# EAGLE board controlnode (EAGLE 6.5.0)

Size 100 x 80 mm. Coordinates in mm from the lower left corner, seen from the top.
Outline: 0,0 100,0 100,80 0,80 0,0
Copper layers (1*16): Top 0.035mm / dielectric 1.5mm / Bottom 0.035mm
Design rules "SeeedStudio_2layer_DRU_no_angle_20140221": minimum track width 6mil, minimum drill 12mil, track to track 6mil, track to pad 6mil, pad to pad 6mil, via to via 6mil, smd to smd 0mil, copper to edge 10mil, drill to drill 10mil, minimum pad ring 10mil, minimum via ring 6mil, stop-mask expansion 2mil, vias tented up to drill 100mil, thermal gap 10mil

## Footprints (pad centres in the part's own frame; a part is rotated, then mirrored left to right if it is on the bottom)
C0805 = smd 1.3 x 1.5: 1 -0.95,0; 2 0.95,0
C1206 = smd 1.6 x 1.8: 1 -1.4,0; 2 1.4,0
E3,5-10 = drill 0.813 pad 1.6: + -1.778,0 | drill 0.813 pad 1.6 octagon: - 1.778,0
3,2 = hole 3.2: 0,0
ATX24_RIGHT_ANGLE = drill 1.8 pad 2.9: 1 23.1,4.76; 2 18.9,4.76; 3 14.7,4.76; 4 10.5,4.76; 5 6.3,4.76; 6 2.1,4.76; 7 -2.1,4.76; 8 -6.3,4.76; 9 -10.5,4.76; 10 -14.7,4.76; 11 -18.9,4.76; 12 -23.1,4.76; 13 23.1,10.26; 14 18.9,10.26; 15 14.7,10.26; 16 10.5,10.26; 17 6.3,10.26; 18 2.1,10.26; 19 -2.1,10.26; 20 -6.3,10.26; 21 -10.5,10.26; 22 -14.7,10.26; 23 -18.9,10.26; 24 -23.1,10.26 | hole 3: -23.1,-2.54; 23.1,-2.54
SCREWTERMINAL-5MM-3 = drill 1.3 pad 2.413 square: 1 0,0 | drill 1.3 pad 2.413: 2 5,0; 3 10,0
WS2812B = smd 1.5 x 0.9: 1-VDD 2.45,-1.65; 2-DOUT 2.45,1.65; 3-GND -2.45,1.65; 4-DIN -2.45,-1.65
SWITCH-SPDT = drill 1.016 pad 1.88: 1 0,2.54; 2 0,0; 3 0,-2.54
ALPS_EC12E_SW = drill 1 square: A -2.5,-7.5; B 2.5,-7.5; C 0,-7.5; D -2.5,7; E 2.5,7 | drill 2.2 square: GND1 -6.1,0; GND2 6.1,0
LCD-16X2_NOHOLES = drill 1.016 pad 1.88 square: 1 -32,15.5 | drill 1.016 pad 1.88: 2 -29.46,15.5; 3 -26.92,15.5; 4 -24.38,15.5; 5 -21.84,15.5; 6 -19.3,15.5; 7 -16.76,15.5; 8 -14.22,15.5; 9 -11.68,15.5; 10 -9.14,15.5; 11 -6.6,15.5; 12 -4.06,15.5; 13 -1.52,15.5; 14 1.02,15.5; 15 3.56,15.5; 16 6.1,15.5
ARDUINO_PRO_MINI = drill 1.016 pad 1.88: 1 -7.62,12.7; 2 -7.62,10.16; 3 -7.62,7.62; 4 -7.62,5.08; 5 -7.62,2.54; 6 -7.62,0; 7 -7.62,-2.54; 8 -7.62,-5.08; 9 -7.62,-7.62; 10 -7.62,-10.16; 11 -7.62,-12.7; 12 -7.62,-15.24; 13 7.62,-15.24; 14 7.62,-12.7; 15 7.62,-10.16; 16 7.62,-7.62; 17 7.62,-5.08; 18 7.62,-2.54; 19 7.62,0; 20 7.62,2.54; 21 7.62,5.08; 22 7.62,7.62; 23 7.62,10.16; 24 7.62,12.7; A4 4.763,1.429; A5 4.763,3.969; A6 4.763,-9.049; A7 4.763,-6.509; BLK -6.35,15.24; GND -3.81,15.24; GRN 6.35,15.24; RXI 1.27,15.24; TXO 3.81,15.24; VCC -1.27,15.24
5566-4 = drill 1.4 square: 1 2.1,-2.75; 2 -2.1,-2.75; 3 2.1,2.75; 4 -2.1,2.75 | hole 3: 6.8,2.29; -6.8,2.29
5566-6 = drill 1.4 square: 1 4.2,-2.75; 2 0,-2.75; 3 -4.2,-2.75; 4 4.2,2.75; 5 0,2.75; 6 -4.2,2.75 | hole 3: 8.9,2.29; -8.9,2.29

## Placement (x,y rotation side)
C1  100 nF  [C0805]  28.94,40.4 90 bottom
C2  100 nF  [C0805]  51.8,40.4 90 bottom
C3  100 nF  [C0805]  69.58,40.4 90 bottom
C4  100 nF  [C0805]  17.78,53.34 90 top
C5  100 nF  [C0805]  48.26,71.12 270 bottom
C6  10 uF  [C1206]  66.04,71.12 270 bottom
C7  10 uF  [C1206]  27.94,71.12 270 bottom
C8  100 uF  [E3,5-10]  81.28,50.8 0 top
C9  100 uF  [E3,5-10]  81.28,63.5 270 top
H1  MOUNT-HOLE3.2  [3,2]  5,75 0 top
H2  MOUNT-HOLE3.2  [3,2]  95,75 0 top
H3  MOUNT-HOLE3.2  [3,2]  5,5 0 top
H4  MOUNT-HOLE3.2  [3,2]  95,5 0 top
J1  ATX24RH  [ATX24_RIGHT_ANGLE]  49,5 0 bottom
JP1  [SCREWTERMINAL-5MM-3]  95,41 90 bottom
JP2  [SCREWTERMINAL-5MM-3]  95,23 90 bottom
JP3  [SCREWTERMINAL-5MM-3]  5,49 270 bottom
JP4  [SCREWTERMINAL-5MM-3]  5,31 270 bottom
L1  WS2812B  [WS2812B]  16.24,40.4 0 top
L2  WS2812B  [WS2812B]  23.86,40.4 0 top
L3  WS2812B  [WS2812B]  31.48,40.4 0 top
L4  WS2812B  [WS2812B]  39.1,40.4 0 top
L5  WS2812B  [WS2812B]  46.72,40.4 0 top
L6  WS2812B  [WS2812B]  54.34,40.4 0 top
L7  WS2812B  [WS2812B]  61.96,40.4 0 top
L8  WS2812B  [WS2812B]  69.58,40.4 0 top
L9  WS2812B  [WS2812B]  77.2,40.4 0 top
L10  WS2812B  [WS2812B]  84.82,40.4 0 top
S1  [SWITCH-SPDT]  15.16,39.68 0 top
SW1  EC12E_SW  [ALPS_EC12E_SW]  29,26 90 top
SW2  EC12E_SW  [ALPS_EC12E_SW]  66,26 270 top
U1  LCD-16X2NOHOLES  [LCD-16X2_NOHOLES]  50,62 0 top
U$1  ARDUINO_PRO_MINI  [ARDUINO_PRO_MINI]  53.8,57.16 270 bottom
X1  5566-4  [5566-4]  15,12 0 bottom
X2  5566-6  [5566-6]  85,13 0 bottom

## Library data of the parts
C1-C9 = rcl
H1-H4 = holes
J1 JP1-JP4 = SparkFun-Connectors
L1-L10 = adafruit
S1 U1 = SparkFun
SW1 SW2 = switch-alps; MPN: EC12E2424407; OC_FARNELL: 1520813; OC_NEWARK: 74M1068
U$1 = SparkFun-Boards
X1 = con-molex; OC_FARNELL: unknown; OC_NEWARK: unknown
X2 = con-molex; MPN: 95566-61002; OC_FARNELL: unknown; OC_NEWARK: 22K8620

## Nets
5V_STANDBY: J1.9
+3V3: J1.1 J1.2 J1.12 J1.13
+5V: C1.1 C2.1 C3.1 C4.1 C5.1 C6.1 C7.1 C8.+ C9.+ J1.4 J1.6 J1.21 J1.22 J1.23 L1.1-VDD L2.1-VDD L3.1-VDD L4.1-VDD L5.1-VDD L6.1-VDD L7.1-VDD L8.1-VDD L9.1-VDD L10.1-VDD U$1.21
+12V: J1.10 J1.11 X1.3 X1.4 X2.1 X2.2 X2.3
-12V: J1.14
GND: C1.2 C2.2 C3.2 C4.2 C5.2 C6.2 C7.2 C8.- C9.- J1.3 J1.5 J1.7 J1.15 J1.17 J1.18 J1.19 J1.24 L1.3-GND L2.3-GND L3.3-GND L4.3-GND L5.3-GND L6.3-GND L7.3-GND L8.3-GND L9.3-GND L10.3-GND S1.3 U1.16 U$1.4 X1.1 X1.2 X2.4 X2.5 X2.6
N$1: L1.2-DOUT L2.4-DIN
N$2: L2.2-DOUT L3.4-DIN
N$3: L3.2-DOUT L4.4-DIN
N$4: L4.2-DOUT L5.4-DIN
N$5: L5.2-DOUT L6.4-DIN
N$6: L6.2-DOUT L7.4-DIN
N$7: L7.2-DOUT L8.4-DIN
N$8: L8.2-DOUT L9.4-DIN
N$9: L9.2-DOUT L10.4-DIN
N$10: L1.4-DIN U$1.15
N$20: U1.15 U$1.6
PS_ON: J1.16 S1.2
PWR_OK: J1.8
VDD: U1.2
VSS: U1.1

## Tracks (layer width: path | path; a pad name or v marks a point on that pad's centre or on a via)
+3V3  (3 unrouted)
+5V  (24 unrouted)
+12V  (6 unrouted)
GND  (34 unrouted)
N$1  (1 unrouted)
N$2  (1 unrouted)
N$3  (1 unrouted)
N$4  (1 unrouted)
N$5  (1 unrouted)
N$6  (1 unrouted)
N$7  (1 unrouted)
N$8  (1 unrouted)
N$9  (1 unrouted)
N$10  (1 unrouted)
N$20  (1 unrouted)
PS_ON  (1 unrouted)